# Altium PCB PCB_wordclocksmall_2022-11-27.pcbdoc (part 3 of 4)
Units mm, origin at the board's own origin, x right, y up, seen from the top; angles counter-clockwise.
Board outline 250.51 x 237.35 mm, 2 copper layers (Top Layer, Bottom Layer); 318 components, 218 nets, 1024 pads, 203 vias.
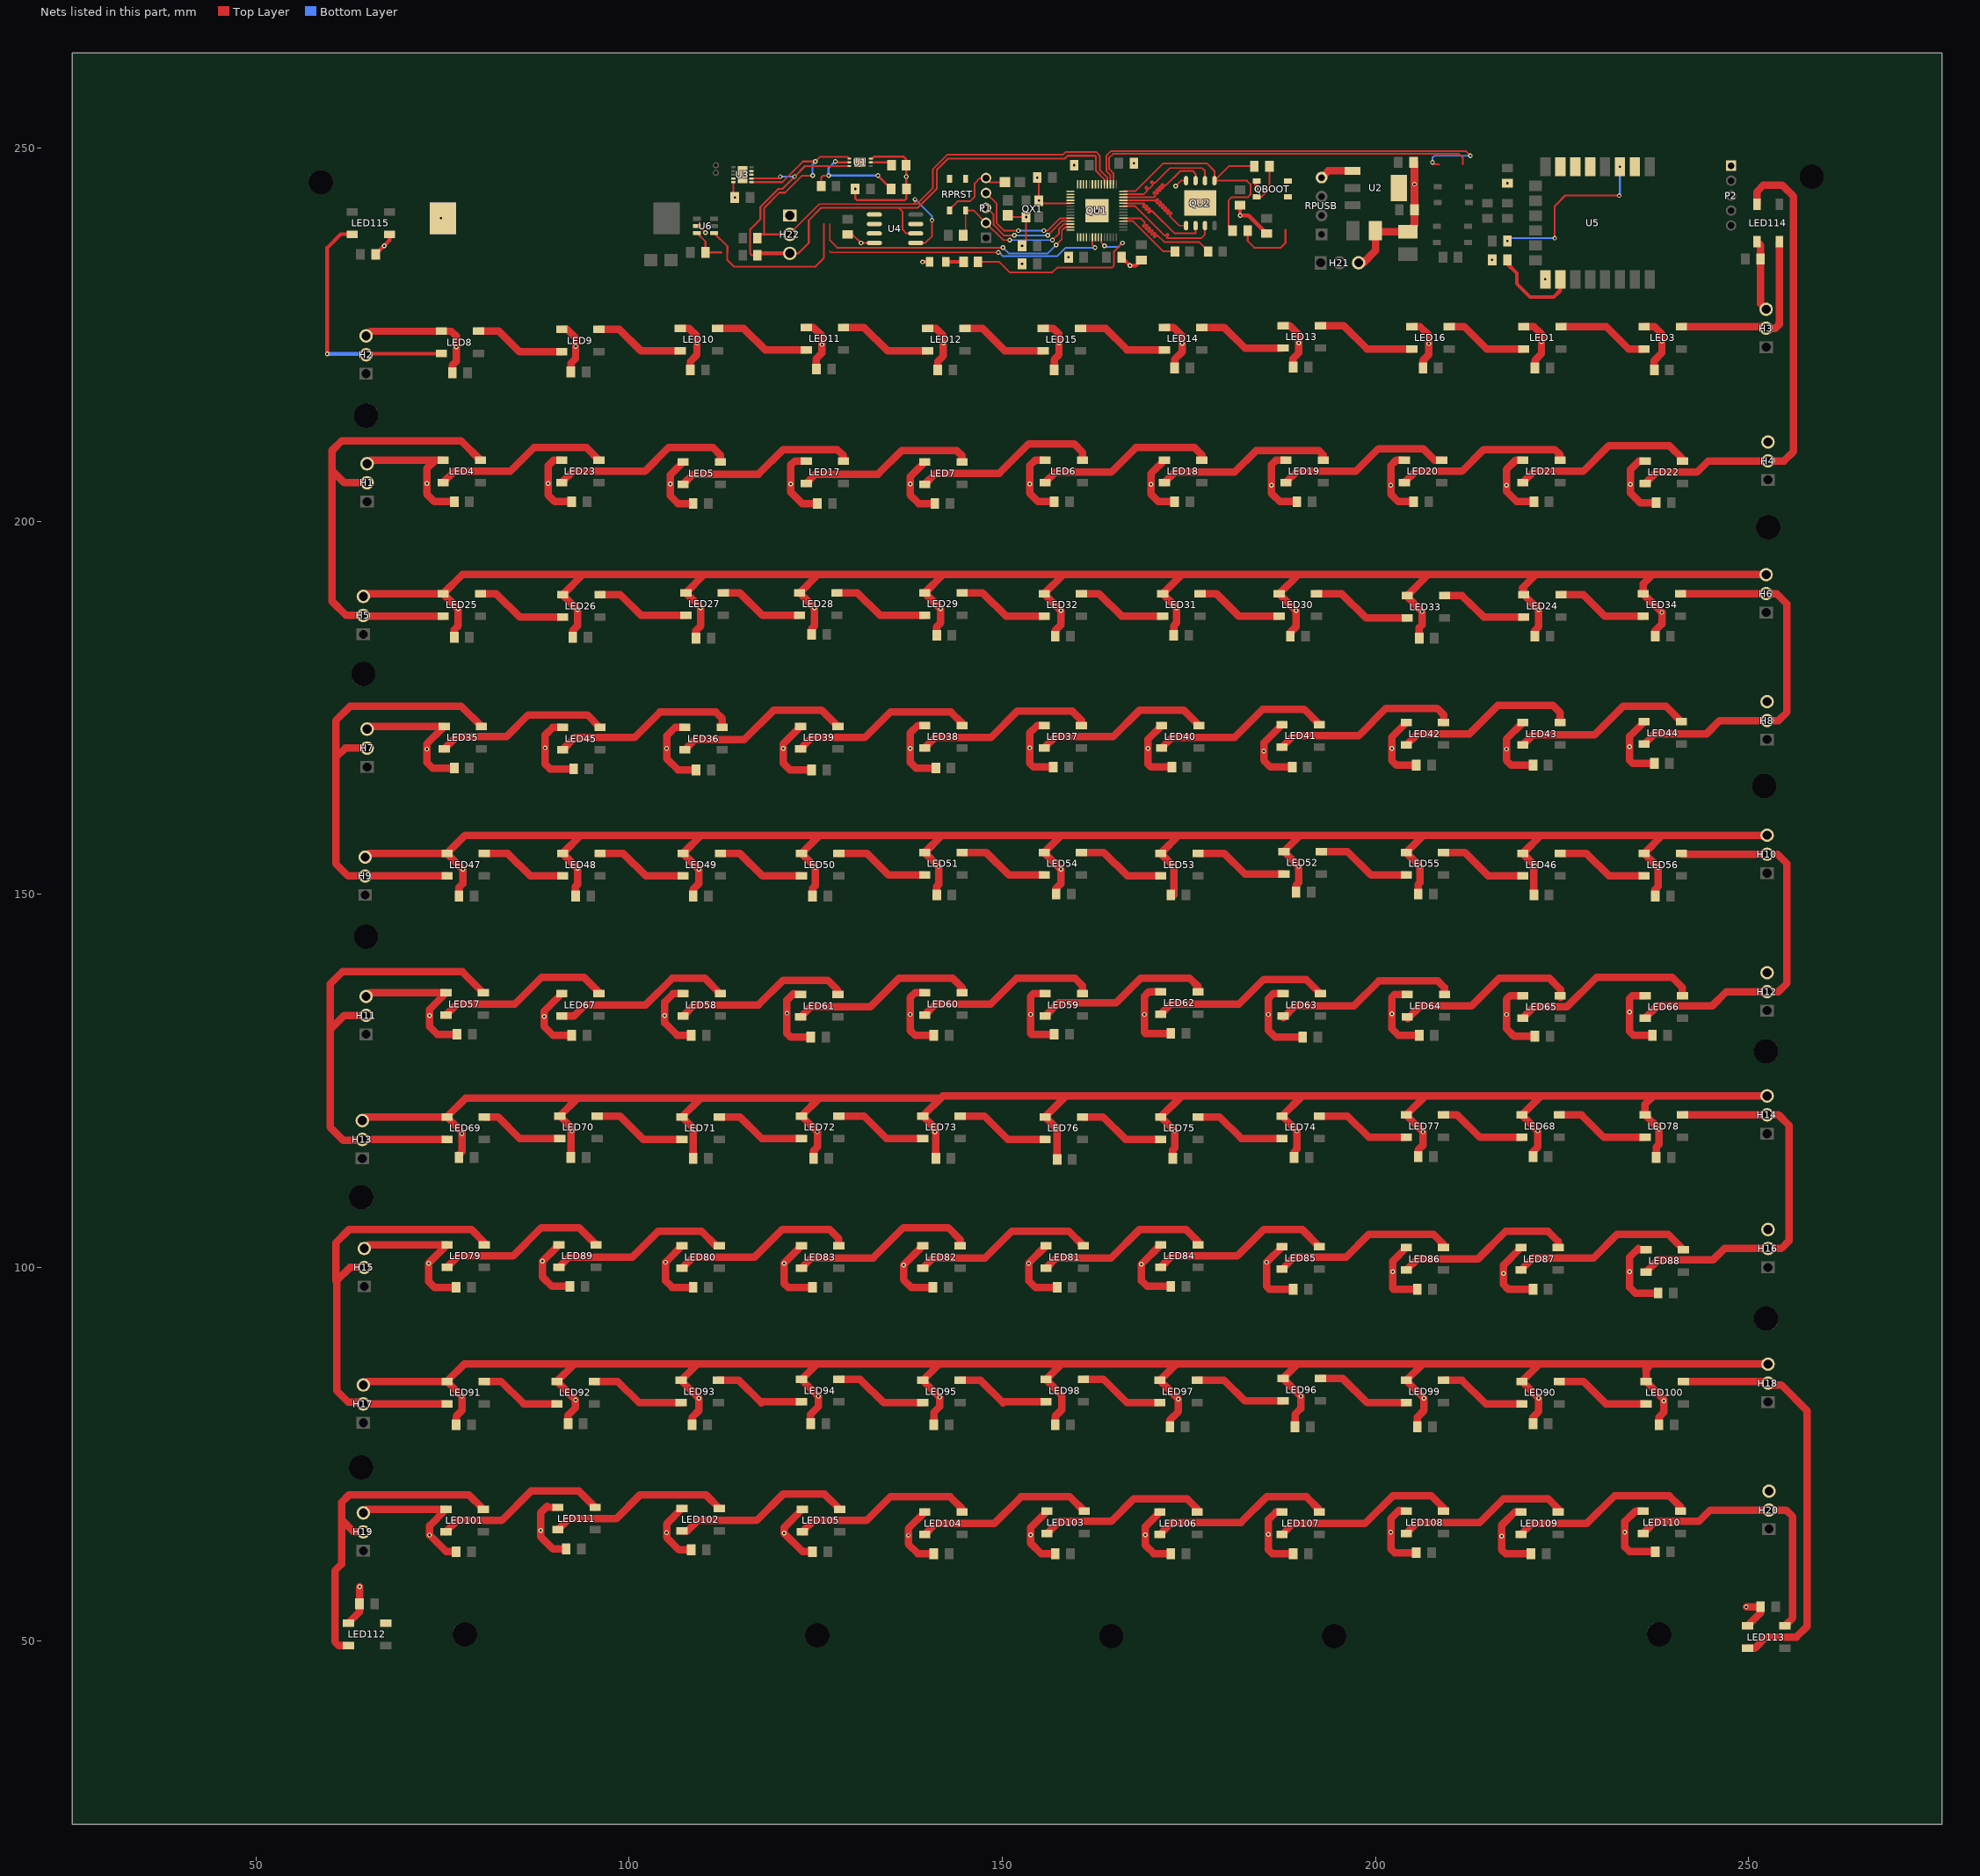
[diagram p3: the nets of this part, all layers, seen from the top]

## Via types
v1: diameter 0.635, hole 0.305, Top Layer to Bottom Layer, tented both sides, 165 vias
v2: diameter 0.61, hole 0.305, Top Layer to Bottom Layer, tented both sides, 37 vias
v3: diameter 1, hole 0.5, Top Layer to Bottom Layer, tented both sides, 1 vias

## Nets (pads, with @x,y where several pads share a name; then routed paths per layer and width w, separated by ;. In a path a pad name is that pad's centre, name@x,y a point inside that pad or via, vN(x,y) a via of type N, cw(c..) or ccw(c..) an arc to the next point about the centre after c; other vN are vias at no path point) (continued)
GND: BT1.2 BT2.2 C1.2 C2.1 C3.2 C5.2 C6.1 C7.2 C8.2 C9.2 C10.1 C11.2 C12.2 C13.2 C14.2 C15.2 C16.2 C17.2 C18.2 C19.2 C20.2 C21.2 C22.2 C23.2 C24.2 C25.2 C26.2 C27.2 C28.2 C29.2 C30.2 C31.2 C32.2 C33.2 C34.2 C35.2 C36.2 C37.2 C38.2 C39.2 C40.2 C41.2 C42.2 C43.2 C44.2 C45.2 C46.2 C47.2 C48.2 C49.2 C50.2 C51.2 C52.2 C53.2 C54.2 C55.2 C56.2 C57.2 C58.2 C59.2 C60.2 C61.2 C62.2 C63.2 C64.2 C65.2 C66.2 C67.2 C68.2 C69.2 C70.2 C71.2 C72.2 C73.2 C74.2 C75.2 C76.2 C77.2 C78.2 C79.2 C80.2 C81.2 C82.2 C83.2 C84.2 C85.2 C86.2 C87.2 C88.2 C89.2 C90.2 C91.2 C92.2 C93.2 C94.2 C95.2 C96.2 C97.2 C98.2 C99.2 C100.2 C101.2 C102.2 C103.2 C104.2 C105.2 C106.2 C107.2 C108.2 C109.2 C110.2 C111.2 C112.2 C113.2 C114.2 C115.2 C116.2 C117.2 C118.2 C119.2 C120.2 C121.2 C122.2 C123.2 C124.2 C125.1 C126.1 C127.1 C128.1 C129.2 C130.2 C131.1 C132.1 C133.1 C134.2 C135.1 C136.2 H1.3 H2.3 H3.3 H4.3 H5.3 H6.3 H7.3 H8.3 H9.3 H10.3 H11.3 H12.3 H13.3 H14.3 H15.3 H16.3 H17.3 H18.3 H19.3 H20.3 H21.3 H22.1 LED1.3 LED3.3 LED4.3 LED5.3 LED6.3 LED7.3 LED8.3 LED9.3 LED10.3 LED11.3 LED12.3 LED13.3 LED14.3 LED15.3 LED16.3 LED17.3 LED18.3 LED19.3 LED20.3 LED21.3 LED22.3 LED23.3 LED24.3 LED25.3 LED26.3 LED27.3 LED28.3 LED29.3 LED30.3 LED31.3 LED32.3 LED33.3 LED34.3 LED35.3 LED36.3 LED37.3 LED38.3 LED39.3 LED40.3 LED41.3 LED42.3 LED43.3 LED44.3 LED45.3 LED46.3 LED47.3 LED48.3 LED49.3 LED50.3 LED51.3 LED52.3 LED53.3 LED54.3 LED55.3 LED56.3 LED57.3 LED58.3 LED59.3 LED60.3 LED61.3 LED62.3 LED63.3 LED64.3 LED65.3 LED66.3 LED67.3 LED68.3 LED69.3 LED70.3 LED71.3 LED72.3 LED73.3 LED74.3 LED75.3 LED76.3 LED77.3 LED78.3 LED79.3 LED80.3 LED81.3 LED82.3 LED83.3 LED84.3 LED85.3 LED86.3 LED87.3 LED88.3 LED89.3 LED90.3 LED91.3 LED92.3 LED93.3 LED94.3 LED95.3 LED96.3 LED97.3 LED98.3 LED99.3 LED100.3 LED101.3 LED102.3 LED103.3 LED104.3 LED105.3 LED106.3 LED107.3 LED108.3 LED109.3 LED110.3 LED111.3 LED112.3 LED113.3 LED114.3 LED115.3 LED116.1 P1.5 P2.1 QBOOT.4 QU1.19 QU1.57 QU2.4 QX1.2 QX1.4 R1.2 R16.1 RPRST.4 RPUSB.4 U1.3 U2.1 U3.5 U4.4 U5.9 U6.2 | length 1994.6
  Top Layer w0.229: v1(131.066,237.291) U4.4@132.866,237.291 ; RPRST.4@142.945,241.668 142.945,241.804 144.02,242.879 145.671,242.879 146.306,243.514 146.306,245.292 146.941,245.927 147.767,245.927 P1.5@147.83,245.99 ; v1(152.656,236.91) 153.203,237.457 v1(153.203,240.763) ; v1(154.688,246.054) 154.903,245.839 v1(154.903,242.963) 155.257,242.609 QU1.19@159.139,242.609
  Top Layer w0.254: U6.2@109.089,239.577 109.349,239.577 v1(110.238,238.688) ; U3.5@113.974,245.435 113.974,243.588 v2(114.175,243.387) ; C136.2@129.288,238.434 129.923,238.434 v1(131.066,237.291) ; P1.5@147.83,245.99 148.401,245.419 C135.1@150.386,245.419 ; C134.2@150.751,240.99 150.978,240.763 v1(153.203,240.763) ; v1(173.23,244.911) 173.957,245.637 QU2.4@174.627,245.638
  Top Layer w0.3: v1(130.304,244.53) 130.304,243.26 130.558,243.006 136.908,243.006 137.162,243.26 C7.2@137.162,244.53 v1(137.162,246.181) 137.162,247.655 R1.2@137.113,247.705 ; U1.3@132.367,248.586 132.583,248.586 132.844,248.848 136.781,248.848 137.112,248.518 R1.2@137.113,247.705
  Top Layer w0.508: C122.2@66.042,235.767 v1(67.19,236.915) 67.907,237.632 LED115.3@67.907,238.458 ; v1(139.321,234.751) LED116.1@140.253,234.751 ; C133.1@165.991,235.386 v1(167.134,234.243) 167.896,234.243 C124.2@168.658,235.005 ; C129.2@181.866,242.371 v1(181.866,240.974) 183.009,240.974 C131.1@185.422,238.561 ; v2(184.025,244.53) 184.025,245.546 QBOOT.4@184.084,245.605
  Top Layer w0.991: H2.3@64.772,224.845 65.383,225.456 LED8.3@74.845,225.456 ; LED8.3@74.846,225.457 76.177,225.457 76.837,224.845 v1(76.837,223.378) 76.837,221.416 76.329,220.908 C16.2@76.329,219.892 ; LED9.3@90.975,225.711 91.719,225.711 92.839,224.591 v1(92.839,223.404) 92.839,221.797 92.204,221.162 C17.2@92.204,220.019 ; LED10.3@106.85,225.838 108.054,225.838 109.095,224.845 v1(109.095,223.861) 109.095,222.305 108.206,221.416 C18.2@108.206,220.273 ; LED11.3@123.741,225.965 124.691,225.965 125.859,224.845 v1(125.859,223.683) 125.859,222.559 125.097,221.797 C19.2@125.097,220.4 ; LED12.3@139.996,225.837 141.123,225.837 142.115,224.845 v1(142.115,223.912) 142.115,222.178 141.353,221.416 C20.2@141.353,220.273 ; LED15.3@155.491,225.838 156.822,225.838 157.609,225.099 v1(157.609,223.886) 157.609,222.305 156.974,221.67 C23.2@156.974,220.273 ; LED14.3@171.747,225.965 172.951,225.965 174.119,224.845 v1(174.119,223.836) 174.119,222.686 173.103,221.67 C22.2@173.103,220.527 ; LED13.3@187.621,226.218 188.494,226.218 189.74,224.972 v1(189.74,223.886) 189.74,222.559 188.978,221.797 C21.2@188.978,220.654 ; LED16.3@204.894,226.092 205.971,226.092 207.139,224.972 v1(207.139,223.81) 207.139,222.305 206.377,221.543 C5.2@206.377,220.527 ; LED1.3@219.88,226.092 221.211,226.092 222.252,225.099 v1(222.252,224.09) 222.252,222.432 221.363,221.543 C11.2@221.363,220.527 ; LED3.3@236.008,226.091 237.389,226.091 238.381,225.099 v1(238.381,224.14) 238.381,222.559 237.365,221.543 C1.2@237.365,220.273
  Top Layer w1: LED112.3@62.399,52.355 63.883,53.839 C119.2@63.883,54.919 v1(63.883,57.205) ; H13.3@64.264,119.689 64.748,120.173 LED69.3@75.607,120.173 ; H19.3@64.391,67.111 64.875,67.595 LED101.3@75.48,67.595 73.281,65.396 v1(73.281,64.137) 75.515,61.904 C108.2@76.837,61.904 ; H17.3@64.391,84.256 64.875,84.74 LED91.3@75.607,84.74 ; H5.3@64.391,189.92 64.748,190.277 LED25.3@75.099,190.277 ; H15.3@64.518,102.544 65.002,103.028 LED79.3@75.607,103.028 v1(73.154,100.575) 73.154,98.099 73.916,97.337 C86.2@76.837,97.337 ; H9.3@64.645,154.995 65.129,155.479 LED47.3@75.607,155.479 ; H11.3@64.772,136.326 65.256,136.81 LED57.3@75.48,136.81 73.281,134.611 v1(73.281,133.737) 73.281,132.262 74.297,131.246 C64.2@76.964,131.246 ; H7.3@64.899,172.14 65.256,172.497 LED35.3@75.226,172.497 72.9,170.171 v1(72.9,169.467) 72.9,167.695 73.662,166.933 C42.2@76.583,166.933 ; H1.3@64.899,207.7 65.383,208.184 LED4.3@75.099,208.184 ; v1(72.9,205.052) 72.9,203.636 73.916,202.62 C12.2@76.583,202.62 ; v1(72.9,205.052) 72.9,207.065 74.069,208.185 LED4.3@75.1,208.185 ; C32.2@76.583,184.459 76.583,185.475 77.091,185.983 v1(77.091,188.285) LED25.3@75.099,190.277 ; C98.2@76.837,78.922 76.837,80.065 77.599,80.827 v1(77.599,82.748) LED91.3@75.607,84.74 ; C76.2@77.218,114.736 77.218,115.117 77.599,115.498 v1(77.599,117.927) 77.599,118.181 LED69.3@75.607,120.173 ; C54.2@77.218,149.788 77.218,150.931 77.726,151.439 v1(77.726,153.36) LED47.3@75.607,155.479 ; v1(89.156,205.052) 89.156,203.509 90.045,202.62 C30.2@92.331,202.62 ; v1(89.156,205.052) 89.156,207.446 89.894,208.184 LED23.3@90.974,208.184 ; LED111.3@90.466,67.849 89.18,67.849 89.029,68 88.14,67.111 v1(88.14,64.747) 88.14,63.936 89.791,62.285 C118.2@91.569,62.285 ; LED89.3@90.593,103.028 v1(88.394,100.829) 88.394,98.734 89.664,97.464 C96.2@92.077,97.464 ; LED67.3@90.974,136.683 88.648,134.357 v1(88.648,133.653) 88.648,132.262 89.791,131.119 C74.2@92.331,131.119 ; LED45.3@91.101,172.37 89.767,172.37 88.775,171.378 v1(88.775,169.636) 88.775,167.441 89.41,166.806 C52.2@92.585,166.806 ; C99.2@91.823,79.049 91.823,80.192 92.839,81.208 v1(92.839,82.24) LED92.3@90.339,84.74 92.649,87.05 ; C77.2@92.204,114.736 92.204,118.181 v1(92.331,118.308) 92.331,118.689 LED70.3@90.72,120.3 93.109,122.688 109.619,122.688 ; C33.2@92.458,184.459 92.458,185.348 93.093,185.983 v1(93.093,188.158) LED26.3@91.101,190.15 93.792,192.841 ; C55.2@92.839,149.788 92.839,151.058 93.093,151.312 v1(93.093,153.487) LED48.3@91.101,155.479 93.538,157.916 ; 93.49,122.688 78.123,122.688 LED69.3@75.607,120.173 ; v1(105.539,205.001) 105.539,203.382 106.555,202.366 C13.2@108.587,202.366 ; v1(105.539,205.001) 105.539,206.239 LED5.3@107.23,207.93 ; LED102.3@107.103,67.722 105.031,65.65 v1(105.031,64.442) 105.031,63.809 106.682,62.158 C109.2@108.333,62.158 ; LED80.3@107.103,102.901 v1(104.904,100.702) 104.904,98.226 105.793,97.337 C87.2@108.587,97.337 ; LED58.3@107.23,136.683 105.896,136.683 104.777,135.564 v1(104.777,133.737) 104.777,132.77 106.428,131.119 C65.2@108.333,131.119 ; LED36.3@107.484,172.37 106.15,172.37 105.031,171.251 v1(105.031,169.551) 105.031,168.203 106.555,166.679 C43.2@108.968,166.679 ; C100.2@108.46,78.922 108.46,79.938 109.349,80.827 v1(109.349,82.494) LED93.3@106.976,84.867 109.159,87.05 ; C78.2@108.587,114.609 108.587,118.181 v1(108.841,118.435) LED71.3@107.103,120.173 109.619,122.688 ; C56.2@108.587,149.788 108.587,150.677 109.349,151.439 v1(109.349,153.36) LED49.3@107.23,155.479 109.667,157.916 ; C34.2@108.968,184.332 108.968,185.348 109.603,185.983 v1(109.603,188.412) LED27.3@107.611,190.404 110.048,192.841 ; v1(120.779,64.391) 123.266,61.904 C110.2@124.589,61.904 ; v1(120.779,64.391) 120.779,65.142 LED105.3@123.232,67.595 ; v1(121.668,205.001) 121.668,203.89 123.192,202.366 C14.2@125.224,202.366 ; v1(121.668,205.001) 121.668,207.573 122.202,208.058 LED17.3@123.741,208.058 ; LED61.3@122.978,136.556 122.2,136.556 122.049,136.707 121.16,135.818 v1(121.16,134.076) 121.16,131.373 121.668,130.865 C66.2@124.335,130.865 ; LED39.3@122.978,172.497 120.652,170.171 v1(120.652,169.551) 120.652,167.568 121.541,166.679 C44.2@124.462,166.679 ; LED83.3@123.105,102.901 v1(120.779,100.575) 120.779,97.845 121.287,97.337 C88.2@124.589,97.337 ; C101.2@124.335,79.049 124.335,80.319 125.351,81.335 v1(125.351,82.748) LED94.3@123.105,84.994 125.161,87.05 ; C35.2@124.462,184.84 124.462,185.602 124.843,185.983 v1(124.843,188.412) LED28.3@122.851,190.404 125.288,192.841 ; C57.2@124.589,149.788 124.589,150.804 124.97,151.185 v1(124.97,153.614) LED50.3@123.105,155.479 125.542,157.916 ; C79.2@124.716,114.609 124.716,115.625 125.224,116.133 v1(125.224,118.181) LED72.3@123.105,120.3 125.494,122.688 ; v1(137.67,205.001) 137.67,203.509 138.813,202.366 C15.2@140.972,202.366 ; v1(137.67,205.001) 137.67,205.985 LED7.3@139.615,207.93 ; LED82.3@139.361,102.901 v1(136.781,100.321) 136.781,98.353 137.797,97.337 C89.2@140.718,97.337 ; LED104.3@139.615,67.214 137.416,65.015 v1(137.416,64.086) 137.416,62.92 138.686,61.65 C111.2@140.845,61.65 ; LED60.3@139.616,136.811 138.331,136.811 137.67,136.199 v1(137.67,133.907) 137.67,131.754 138.305,131.119 C67.2@140.845,131.119 ; LED38.3@139.616,172.625 138.712,172.625 137.67,171.632 v1(137.67,169.551) 137.67,167.695 138.432,166.933 C45.2@141.099,166.933 ; C102.2@140.845,78.922 140.845,80.573 141.607,81.335 v1(141.607,82.621) LED95.3@139.361,84.867 141.544,87.05 ; C80.2@141.099,114.609 141.099,118.032 v1(140.972,118.159) 140.972,118.689 LED73.3@139.361,120.3 142.052,122.991 158.562,122.991 ; C58.2@141.226,149.915 141.226,151.058 141.48,151.312 v1(141.48,153.741) LED51.3@139.615,155.606 141.925,157.916 ; C36.2@141.226,184.713 141.226,185.856 141.734,186.364 v1(141.734,188.285) LED29.3@139.615,190.404 142.052,192.841 ; 141.75,122.688 125.494,122.688 ; LED37.3@155.618,172.625 154.714,172.625 153.672,171.632 v1(153.672,169.636) 153.672,167.568 154.18,167.06 C46.2@156.847,167.06 ; LED59.3@155.744,136.683 154.156,136.683 153.799,136.326 v1(153.799,133.907) 153.799,131.373 153.926,131.246 C68.2@156.974,131.246 ; LED6.3@155.744,208.184 154.41,208.184 153.672,207.446 v1(153.672,205.001) 153.672,203.763 154.815,202.62 C24.2@156.974,202.62 ; LED81.3@155.871,102.901 v1(153.545,100.575) 153.545,98.226 154.434,97.337 C90.2@157.355,97.337 ; LED103.3@155.998,67.341 153.799,65.142 v1(153.799,64.188) 153.799,63.047 155.196,61.65 C112.2@157.101,61.65 ; C103.2@157.101,78.922 157.101,80.065 157.99,80.954 157.99,82.875 LED98.3@155.871,84.994 157.927,87.05 ; C37.2@157.101,184.586 157.101,185.348 157.863,186.11 v1(157.863,188.031) LED32.3@155.617,190.277 158.181,192.841 ; C59.2@157.228,150.042 157.228,150.804 157.863,151.439 v1(157.863,153.36) LED54.3@155.617,155.606 157.927,157.916 ; C81.2@157.355,114.482 157.355,118.562 v1(157.228,118.689) LED76.3@155.744,120.173 158.562,122.991 ; LED106.3@171.111,67.214 169.166,65.269 v1(169.166,64.188) 169.166,62.793 170.309,61.65 C113.2@172.595,61.65 ; LED84.3@171.238,103.028 v1(168.658,100.448) 168.658,98.226 169.42,97.464 C91.2@172.595,97.464 ; LED62.3@171.238,136.937 169.65,136.937 169.039,136.326 v1(169.039,133.907) 169.039,131.5 169.166,131.373 C69.2@172.595,131.373 ; LED40.3@171.365,172.624 169.547,170.806 v1(169.547,169.551) 169.547,167.441 169.928,167.06 C47.2@172.722,167.06 ; LED18.3@171.746,208.184 169.928,206.366 v1(169.928,204.916) 169.928,203.636 170.944,202.62 C25.2@173.103,202.62 ; C104.2@172.468,78.668 172.468,79.557 173.611,80.7 v1(173.611,82.367) LED97.3@171.111,84.867 173.294,87.05 ; C60.2@172.595,149.915 172.976,149.915 v1(172.976,153.741) ; C82.2@172.849,114.609 172.849,115.752 173.103,116.006 v1(173.103,118.308) LED75.3@171.238,120.173 174.056,122.991 ; v1(172.976,153.741) LED53.3@171.238,155.479 173.675,157.916 ; C38.2@172.976,184.713 172.976,185.983 173.357,186.364 v1(173.357,188.412) LED31.3@171.492,190.277 174.056,192.841 ; LED107.3@187.494,67.214 186.668,67.214 185.676,66.222 v1(185.676,64.239) 185.676,62.158 186.184,61.65 C114.2@188.978,61.65 ; LED85.3@187.494,102.774 v1(185.422,100.702) 185.422,97.464 185.803,97.083 C92.2@188.978,97.083 ; LED41.3@187.494,172.751 185.041,170.298 v1(185.041,169.213) 185.041,167.949 185.93,167.06 C48.2@188.851,167.06 ; LED63.3@187.621,136.683 186.287,136.683 185.676,136.072 v1(185.676,133.907) 185.676,131.754 186.565,130.865 C70.2@190.248,130.865 ; LED19.3@188.002,208.184 186.668,208.184 186.057,207.573 v1(186.057,204.832) 186.057,203.763 187.2,202.62 C26.2@189.486,202.62 ; C39.2@188.597,184.586 188.597,185.094 189.359,185.856 v1(189.359,188.031) LED30.3@187.113,190.277 189.677,192.841 ; C83.2@189.105,114.736 189.105,115.498 189.486,115.879 v1(189.486,118.308) LED74.3@187.494,120.3 190.185,122.991 ; C105.2@189.232,78.668 189.232,80.319 189.994,81.081 v1(189.994,82.748) LED96.3@187.621,85.121 189.55,87.05 206.736,87.05 ; C61.2@189.359,150.296 189.359,151.185 189.74,151.566 v1(189.74,153.741) LED52.3@187.748,155.733 189.931,157.916 ; 190.074,87.05 173.294,87.05 ; v1(202.059,64.544) 202.059,62.285 202.567,61.777 C115.2@205.488,61.777 ; v1(202.059,64.544) 202.059,66.349 203.202,67.492 203.353,67.341 LED108.3@204.131,67.341 ; LED20.3@203.877,208.184 202.797,208.184 202.059,207.446 v1(202.059,204.832) 202.059,203.636 203.075,202.62 C27.2@205.107,202.62 ; LED86.3@204.131,102.647 202.313,100.829 v1(202.313,99.447) 202.313,97.21 202.44,97.083 C93.2@205.615,97.083 ; LED42.3@204.131,173.005 202.186,171.06 v1(202.186,169.551) 202.186,167.949 202.821,167.314 C49.2@205.488,167.314 ; LED64.3@204.258,136.556 202.543,136.556 202.186,136.199 v1(202.186,133.991) 202.186,132.008 203.075,131.119 C71.2@205.869,131.119 ; C106.2@205.615,78.668 205.615,79.938 206.504,80.827 v1(206.504,82.494) LED99.3@204.131,84.867 206.314,87.05 221.935,87.05 ; C84.2@205.742,114.863 205.742,115.752 206.377,116.387 v1(206.377,118.181) LED77.3@204.131,120.427 206.695,122.991 222.189,122.991 ; C62.2@205.742,150.042 205.742,151.312 205.996,151.566 v1(205.996,153.741) LED55.3@204.131,155.606 206.441,157.916 ; C40.2@205.869,184.332 205.869,185.729 206.25,186.11 v1(206.25,187.888) 204.258,189.88 LED33.3@204.258,190.023 207.076,192.841 ; 207.153,122.991 190.185,122.991 ; LED109.3@219.498,67.214 218.672,67.214 216.918,65.46 v1(216.918,63.985) 216.918,62.158 217.426,61.65 C116.2@220.855,61.65 ; LED87.3@219.498,102.647 217.172,100.321 v1(217.172,99.193) 217.172,97.718 217.807,97.083 C94.2@221.109,97.083 ; LED65.3@219.752,136.429 218.037,136.429 217.553,135.945 v1(217.553,133.907) 217.553,132.008 218.569,130.992 C72.2@221.363,130.992 ; LED43.3@219.752,173.005 217.553,170.806 v1(217.553,169.467) 217.553,167.949 218.188,167.314 C50.2@221.109,167.314 ; LED21.3@219.752,208.184 218.799,208.184 217.553,206.938 v1(217.553,204.832) 217.553,204.017 218.95,202.62 C28.2@221.236,202.62 ; C97.2@221.109,79.049 221.109,79.938 221.871,80.7 v1(221.871,82.494) LED90.3@219.625,84.74 221.935,87.05 ; C75.2@221.109,114.863 221.109,115.498 221.744,116.133 v1(221.744,118.308) LED68.3@219.625,120.427 222.189,122.991 ; C53.2@221.236,149.915 221.236,153.741 v1(221.363,153.868) LED46.3@219.752,155.479 222.189,157.916 ; C31.2@221.363,184.586 221.363,185.348 221.871,185.856 v1(221.871,188.158) LED24.3@219.879,190.15 219.879,190.896 219.712,191.063 221.49,192.841 ; LED110.3@235.882,67.342 234.851,67.342 233.428,65.968 v1(233.428,64.544) 233.428,62.539 234.063,61.904 C117.2@237.492,61.904 ; LED44.3@236.008,173.132 234.063,171.187 v1(234.063,169.805) 234.063,167.949 234.444,167.568 C51.2@237.365,167.568 ; LED66.3@236.135,136.429 234.42,136.429 234.063,136.072 v1(234.063,134.245) 234.063,131.627 234.571,131.119 C73.2@237.111,131.119 ; LED22.3@236.135,208.057 235.309,208.057 234.19,206.938 v1(234.19,204.916) 234.19,203.763 235.46,202.493 C29.2@237.619,202.493 ; LED88.3@236.262,102.393 235.357,102.393 235.206,102.544 234.063,101.401 v1(234.063,99.447) 234.063,97.337 234.825,96.575 C95.2@237.873,96.575 ; C63.2@237.492,149.788 237.492,150.677 237.873,151.058 v1(237.873,153.614) LED56.3@236.008,155.479 238.445,157.916 ; C41.2@237.492,184.586 237.492,185.348 238.381,186.237 v1(238.381,187.777) LED34.3@235.881,190.277 235.881,191.611 237.111,192.841 ; C85.2@237.619,114.736 237.619,116.133 238,116.514 v1(238,118.562) LED78.3@236.135,120.427 236.135,121.888 237.238,122.991 ; C107.2@238,78.922 238,79.938 238.635,80.573 v1(238.635,82.113) 238.635,82.367 LED100.3@236.262,84.74 236.262,86.248 236.222,86.288 236.984,87.05 ; v1(249.684,54.538) C120.2@251.589,54.538 251.589,53.712 LED113.3@249.851,51.974 ; H6.3@252.351,192.841 237.111,192.841 ; H14.3@252.478,122.991 237.238,122.991 ; H10.3@252.478,157.916 238.445,157.916 ; H18.3@252.605,87.05 236.984,87.05 ; LED25.3@75.099,190.277 77.663,192.841 93.792,192.841 ; LED91.3@75.607,84.74 77.917,87.05 92.649,87.05 ; LED47.3@75.607,155.479 78.044,157.916 93.538,157.916 ; 92.649,87.05 109.159,87.05 ; 93.538,157.916 109.667,157.916 ; 93.792,192.841 110.048,192.841 ; 109.159,87.05 125.161,87.05 ; 109.619,122.688 125.494,122.688 ; 109.667,157.916 125.542,157.916 ; 110.048,192.841 125.288,192.841 ; 125.161,87.05 141.544,87.05 ; 125.288,192.841 142.052,192.841 ; 125.542,157.916 141.925,157.916 ; 141.544,87.05 157.927,87.05 ; 141.925,157.916 157.927,157.916 ; 142.052,192.841 158.181,192.841 ; 157.927,87.05 173.294,87.05 ; 157.927,157.916 173.675,157.916 ; 158.181,192.841 174.056,192.841 ; 158.562,122.991 174.056,122.991 ; 173.675,157.916 189.931,157.916 ; 174.056,122.991 190.185,122.991 ; 174.056,192.841 189.677,192.841 ; 189.677,192.841 207.076,192.841 ; 189.931,157.916 206.441,157.916 ; 206.441,157.916 222.189,157.916 ; 207.076,192.841 221.49,192.841 ; 221.49,192.841 237.111,192.841 ; 221.935,87.05 236.984,87.05 ; 222.189,122.991 237.238,122.991 ; 222.189,157.916 238.445,157.916
  Top Layer w1.016: RPUSB.4@192.788,246.054 193.69,246.956 U2.1@196.929,246.956 ; H21.3@197.741,234.624 198.376,234.624 200.004,236.252 C8.2@200.004,238.942 200.154,238.792 C9.2@204.345,238.792 205.234,239.681 C2.1@205.234,241.736 v2(205.234,245.165) 205.234,248.086 C10.1@205.107,248.086 ; LED114.3@251.105,237.458 251.589,236.974 C121.2@251.589,235.132 251.589,229.163 H3.3@252.351,228.401
  other v1: 152.656,234.497 158.879,235.386 74.805,240.593 162.689,241.609 159.641,247.705 167.642,247.959
  other v2: 222.761,232.409 215.648,235.005 217.68,245.292
GPIO0: JP11.2 QU1.2 | length 52.5
  Top Layer w0.229: QU1.2@164.889,245.16 164.889,246.648 164.34,247.197 164.34,248.721 164.848,249.229 211.203,249.229 211.686,248.746 JP11.2@211.686,247.832
GPIO1: JP10.2 QU1.3 | length 60.1
  Top Layer w0.229: QU1.3@164.489,245.159 164.489,246.413 163.959,246.943 163.959,248.975 164.594,249.61 212.092,249.61 v2(212.727,248.975) ; v2(207.647,248.086) 207.901,247.832 JP10.2@208.511,247.832
  Bottom Layer w0.229: v2(207.647,248.086) 207.647,248.721 207.901,248.975 v2(212.727,248.975)
GPIO2: H22.2 QU1.4 R3.2 U1.4 U3.6 U4.5 | length 97.8
  Top Layer w0.229: H22.2@121.541,238.434 121.541,238.561 125.478,242.498 138.559,242.498 140.718,244.657 140.718,247.197 142.623,249.102 158.117,249.102 158.498,249.483 162.562,249.483 163.07,248.975 163.07,247.07 164.089,246.051 QU1.4@164.089,245.16 ; 138.063,242.498 138.305,242.74 v2(138.305,243.133) ; U4.5@138.411,237.291 139.702,237.291 140.591,238.18 v2(140.591,240.339)
  Top Layer w0.254: U3.6@116.409,245.435 120.541,245.434 123.319,248.213 v1(124.97,248.213) 125.605,248.848 129.25,248.848 U1.4@129.512,248.586 ; R3.2@117.174,237.926 117.682,238.434 H22.2@121.541,238.434 118.112,238.434 118.112,241.99 120.144,244.022 120.906,244.022 123.192,246.308 v1(124.589,246.308)
  Bottom Layer w0.229: v2(138.305,243.133) 140.591,240.847 v2(140.591,240.339)
  Bottom Layer w0.254: v1(124.589,246.308) 124.589,247.832 v1(124.97,248.213)
GPIO3: H22.3 QU1.5 R4.2 U1.6 U3.7 U4.6 | length 91.4
  Top Layer w0.229: 136.12,241.99 136.654,241.455 136.654,239.069 137.162,238.561 U4.6@138.411,238.561
  Top Layer w0.254: U3.7@116.409,245.935 120.025,245.935 v2(120.271,246.181) ; R4.2@117.174,235.64 116.461,235.64 116.207,235.894 116.207,239.069 117.604,240.466 117.604,242.117 120.017,244.53 120.525,244.53 v2(122.176,246.181) 123.581,247.586 U1.6@129.512,247.586 ; H22.3@121.541,235.894 122.684,235.894 124.081,237.291 124.081,240.339 125.732,241.99 138.686,241.99 141.226,244.53 141.226,247.07 142.75,248.594 158.371,248.594 158.752,248.975 162.435,248.975 162.562,248.848 162.562,246.943 163.69,245.815 QU1.5@163.69,245.16
  Top Layer w0.5: R4.2@117.174,235.64 117.428,235.894 H22.3@121.541,235.894
  Bottom Layer w0.254: v2(120.271,246.181) v2(122.176,246.181)
GPIO4: QU1.6
GPIO5: QU1.7
GPIO6: QU1.8
GPIO7: QU1.9
GPIO8: QU1.11
GPIO9: QU1.12
GPIO10: QU1.13
GPIO11: QU1.14
GPIO12: QU1.15
GPIO13: QU1.16
GPIO14: QU1.17
GPIO15: QU1.18
GPIO16: JP7.1 QU1.27 | length 37.3
  Top Layer w0.229: JP7.1@126.901,239.831 126.901,237.647 127.891,236.656 v1(150.116,236.656) ; v1(157.228,237.037) 157.99,237.799 157.99,238.942 158.457,239.409 QU1.27@159.139,239.409
  Bottom Layer w0.229: v1(150.116,236.656) 150.878,235.894 156.085,235.894 v1(157.228,237.037)
GPIO17: QU1.28
GPIO18: QU1.29
GPIO19: QU1.30
GPIO20: QU1.31
GPIO21: QU1.32
GPIO22: JP6.1 QU1.34 | length 37.8
  Top Layer w0.229: JP6.1@126.901,236.148 127.028,236.021 v1(149.481,236.021) ; QU1.34@162.089,238.059 162.089,237.002 v1(162.435,236.656)
  Bottom Layer w0.229: v1(149.481,236.021) 149.608,236.021 150.116,235.513 157.355,235.513 158.498,236.656 v1(162.435,236.656)
GPIO23: QU1.35
GPIO24: QU1.36
GPIO25: QU1.37 R13.1 | length 26.7
  Top Layer w0.229: R13.1@146.765,234.751 149.608,234.751 151.005,233.354 156.72,233.354 157.355,233.989 164.721,233.989 164.975,234.243 164.975,236.148 v1(166.118,237.291) ; QU1.37@163.289,238.059 163.289,237.326 v1(163.705,236.91)
  Bottom Layer w0.229: v1(163.705,236.91) 163.832,236.783 165.61,236.783 v1(166.118,237.291)
H1_2: H1.2 H5.2 LED4.2 LED25.4 | length 62.8
  Top Layer w1: H1.2@64.899,205.16 61.851,205.16 60.2,206.811 ; LED25.4@75.099,187.277 64.494,187.277 H5.2@64.391,187.38 62.105,187.38 60.2,189.285 60.2,206.811 ; LED4.2@80.099,208.184 77.535,210.748 61.47,210.748 60.2,209.478 60.2,206.811
H7_2: H7.2 H9.2 LED35.2 LED47.4 | length 60.9
  Top Layer w1: H7.2@64.899,169.6 61.978,169.6 60.708,168.33 ; LED47.4@75.607,152.479 H9.2@64.645,152.455 62.359,152.455 60.708,154.106 60.708,168.33 ; LED35.2@80.226,172.497 77.535,175.188 62.613,175.188 60.708,173.283 60.708,168.33
H11_2: H11.2 H13.2 LED57.2 LED69.4 | length 63.6
  Top Layer w1: H11.2@64.772,133.786 61.851,133.786 59.946,131.881 ; LED69.4@75.607,117.173 64.288,117.173 H13.2@64.264,117.149 64.137,117.022 61.724,117.022 59.946,118.8 59.946,131.881 ; LED57.2@80.48,136.81 77.662,139.628 61.597,139.628 59.946,137.977 59.946,131.881
H15_2: H15.2 H17.2 LED79.2 LED91.4 | length 61.4
  Top Layer w1: 60.708,98.226 60.708,103.306 62.486,105.084 78.869,105.084 80.607,103.346 LED79.2@80.607,103.028 ; H15.2@64.518,100.004 62.613,100.004 60.835,98.226 60.835,83.494 62.359,81.97 64.137,81.97 H17.2@64.391,81.716 LED91.4@75.607,81.74
H19_2: H19.2 LED101.2 LED112.4 | length 44.9
  Top Layer w1: LED112.4@62.4,49.356 61.066,49.356 60.581,49.839 60.581,59.364 61.47,60.253 61.47,66.222 ; H19.2@64.391,64.571 63.121,64.571 61.47,66.222 ; LED101.2@80.48,67.595 78.551,69.524 62.486,69.524 61.47,68.508 61.47,66.222
JP3_1: JP3.1 R12.1 | length 8.9
  Top Layer w0.254: R12.1@182.882,238.942 182.882,237.545 183.771,236.656 187.327,236.656 187.962,237.291 JP3.1@187.962,239.044
JP6_2: JP6.2 JP7.2 JP8.2 U6.4 | length 22.7
  Top Layer w0.254: U6.4@111.387,238.627 113.185,236.83 JP8.2@113.185,236.021 113.159,235.996 113.159,235.005 114.048,234.116 124.97,234.116 126.088,235.234 JP6.2@126.088,236.148 JP7.2@126.088,239.831
LED1_2: LED1.2 LED3.4 | length 12.4
  Top Layer w1: LED1.2@224.879,226.091 230.914,226.09 233.913,223.09 LED3.4@236.008,223.091
LED1_4: LED1.4 LED16.2 | length 11.2
  Top Layer w1: LED16.2@209.893,226.091 211.864,226.09 214.909,223.09 LED1.4@219.879,223.091
LED3_2: H3.2 LED3.2 LED114.4 | length 24.5
  Top Layer w1: LED3.2@241.008,226.091 252.121,226.091 H3.2@252.351,225.861 253.597,225.861 254.105,226.369 LED114.4@254.105,237.458
LED4_4: LED4.4 LED23.2 | length 23.5
  Top Layer w1: LED4.4@75.099,205.184 76.599,206.684 84.076,206.684 87.251,209.859 94.299,209.859 LED23.2@95.974,208.184
LED5_2: LED5.2 LED23.4 | length 24.5
  Top Layer w1: LED23.4@90.974,205.184 92.474,206.684 102.11,206.684 105.285,209.859 111.254,209.859 112.23,208.883 LED5.2@112.23,207.93
LED5_4: LED5.4 LED17.2 | length 24.5
  Top Layer w1: LED5.4@107.23,204.93 108.603,206.303 117.35,206.303 120.652,209.605 127.891,209.605 128.74,208.756 LED17.2@128.74,208.057
LED6_2: LED6.2 LED7.4 | length 24.9
  Top Layer w1: LED7.4@139.615,204.93 141.115,206.43 149.608,206.43 153.545,210.367 159.641,210.367 160.744,209.264 LED6.2@160.744,208.184
LED6_4: LED6.4 LED18.2 | length 24
  Top Layer w1: LED6.4@155.744,205.184 157.117,206.557 164.594,206.557 167.896,209.859 175.77,209.859 176.746,208.883 LED18.2@176.746,208.184
LED7_2: LED7.2 LED17.4 | length 23.8
  Top Layer w1: LED17.4@123.74,205.057 124.986,206.303 133.352,206.303 136.527,209.478 143.893,209.478 144.615,208.756 LED7.2@144.615,207.93
LED8_2: LED8.2 LED9.4 | length 12.3
  Top Layer w1: LED8.2@79.845,225.456 82.577,225.456 85.322,222.71 LED9.4@90.974,222.71
LED9_2: LED9.2 LED10.4 | length 12.1
  Top Layer w1: LED9.2@95.974,225.71 98.706,225.71 101.578,222.837 LED10.4@106.849,222.837
LED10_2: LED10.2 LED11.4 | length 13.1
  Top Layer w1: LED10.2@111.849,225.837 115.344,225.836 118.262,222.963 LED11.4@123.74,222.964
LED11_2: LED11.2 LED12.4 | length 12.5
  Top Layer w1: LED11.2@128.74,225.964 131.473,225.963 134.645,222.836 LED12.4@139.996,222.837
LED12_2: LED12.2 LED15.4 | length 11.7
  Top Layer w1: LED12.2@144.996,225.837 147.347,225.837 150.346,222.837 LED15.4@155.49,222.837
LED13_2: LED13.2 LED16.4 | length 13.6
  Top Layer w1: LED13.2@192.621,226.218 195.733,226.218 198.86,223.091 LED16.4@204.893,223.091
LED13_4: LED13.4 LED14.2 | length 12
  Top Layer w1: LED14.2@176.746,225.965 179.733,225.965 182.527,223.217 LED13.4@187.621,223.218
LED14_4: LED14.4 LED15.2 | length 12.4
  Top Layer w1: LED15.2@160.49,225.837 163.856,225.837 166.729,222.964 LED14.4@171.746,222.964
LED18_4: LED18.4 LED19.2 | length 24
  Top Layer w1: LED18.4@171.746,205.184 173.119,206.557 181.104,206.557 184.025,209.478 192.407,209.478 193.002,208.884 LED19.2@193.002,208.185
LED19_4: LED19.4 LED20.2 | length 23.4
  Top Layer w1: LED19.4@188.002,205.184 189.502,206.684 197.36,206.684 200.408,209.732 206.377,209.732 207.925,208.184 LED20.2@208.877,208.184
LED20_4: LED20.4 LED21.2 | length 23.7
  Top Layer w1: LED20.4@203.877,205.184 205.377,206.684 211.584,206.684 214.505,209.605 224.03,209.605 224.752,208.884 LED21.2@224.752,208.185
LED21_4: LED21.4 LED22.2 | length 24.5
  Top Layer w1: LED21.4@219.752,205.184 221.252,206.684 227.84,206.684 231.269,210.113 239.397,210.113 241.135,208.375 LED22.2@241.135,208.057
LED22_4: H4.2 LED22.4 LED114.2 | length 63.5
  Top Layer w1: LED22.4@236.135,205.057 237.635,206.557 243.08,206.557 244.604,208.081 H4.2@252.605,208.081 254.764,208.081 256.034,209.351 256.034,243.514 254.51,245.038 251.97,245.038 251.107,244.126 LED114.2@251.107,242.457
LED24_2: LED24.2 LED34.4 | length 12.2
  Top Layer w1: LED24.2@224.879,190.15 227.864,190.15 230.737,187.277 LED34.4@235.881,187.277
LED24_4: LED24.4 LED33.2 | length 11.8
  Top Layer w1: LED33.2@209.258,190.024 211.61,190.024 214.531,187.149 LED24.4@219.879,187.15
LED25_2: LED25.2 LED26.4 | length 12.3
  Top Layer w1: LED25.2@80.099,190.278 82.197,190.278 85.372,187.149 LED26.4@91.101,187.15
LED26_2: LED26.2 LED27.4 | length 12.6
  Top Layer w1: LED26.2@96.101,190.15 98.832,190.15 101.578,187.404 LED27.4@107.611,187.404
LED27_2: LED27.2 LED28.4 | length 11.5
  Top Layer w1: LED27.2@112.611,190.405 114.836,190.405 117.884,187.403 LED28.4@122.851,187.404
LED28_2: LED28.2 LED29.4 | length 13
  Top Layer w1: LED28.2@127.851,190.405 130.584,190.405 133.632,187.403 LED29.4@139.615,187.404
LED29_2: LED29.2 LED32.4 | length 12.3
  Top Layer w1: LED29.2@144.615,190.405 147.348,190.405 150.523,187.276 LED32.4@155.617,187.277
LED30_2: LED30.2 LED33.4 | length 13.5
  Top Layer w1: LED30.2@192.113,190.278 195.481,190.278 198.783,187.022 LED33.4@204.258,187.023
LED30_4: LED30.4 LED31.2 | length 11.9
  Top Layer w1: LED31.2@176.492,190.277 178.715,190.277 181.715,187.277 LED30.4@187.113,187.277
LED31_4: LED31.4 LED32.2 | length 12.1
  Top Layer w1: LED32.2@160.617,190.278 162.969,190.278 166.017,187.276 LED31.4@171.492,187.277
LED34_2: H6.2 H8.2 LED34.2 LED44.4 | length 50.2
  Top Layer w1: LED44.4@236.008,170.132 237.381,171.505 244.35,171.505 246.128,173.283 H8.2@252.478,173.283 254.002,173.283 255.145,174.426 255.145,188.904 253.748,190.301 H6.2@252.351,190.301 LED34.2@240.881,190.278
LED35_4: LED35.4 LED45.2 | length 23.5
  Top Layer w1: LED35.4@75.226,169.497 76.853,171.124 83.568,171.124 86.489,174.045 94.426,174.045 LED45.2@96.101,172.37
LED36_2: LED36.2 LED45.4 | length 25
  Top Layer w1: LED45.4@91.101,169.37 92.728,170.997 100.713,170.997 104.142,174.426 111.635,174.426 112.484,173.577 LED36.2@112.484,172.37
LED36_4: LED36.4 LED39.2 | length 23.6
  Top Layer w1: LED36.4@107.484,169.37 108.857,170.743 115.445,170.743 119.382,174.68 125.795,174.68 LED39.2@127.978,172.497
LED37_2: LED37.2 LED38.4 | length 24.3
  Top Layer w1: LED38.4@139.615,169.624 140.988,170.997 148.465,170.997 152.021,174.553 159.387,174.553 160.617,173.323 LED37.2@160.617,172.624
LED37_4: LED37.4 LED40.2 | length 23.7
  Top Layer w1: LED37.4@155.617,169.624 157.117,171.124 164.848,171.124 168.404,174.68 174.309,174.68 LED40.2@176.365,172.624
LED38_2: LED38.2 LED39.4 | length 24.6
  Top Layer w1: LED39.4@122.978,169.497 124.478,170.997 131.574,170.997 135.003,174.426 143.131,174.426 144.615,172.942 LED38.2@144.615,172.624
LED40_4: LED40.4 LED41.2 | length 24.1
  Top Layer w1: LED40.4@171.365,169.624 172.738,170.997 181.104,170.997 184.914,174.807 190.438,174.807 LED41.2@192.494,172.751
LED41_4: LED41.4 LED42.2 | length 25.2
  Top Layer w1: LED41.4@187.494,169.751 188.994,171.251 197.741,171.251 201.424,174.934 208.282,174.934 209.131,174.085 LED42.2@209.131,173.005
LED42_4: LED42.4 LED43.2 | length 24.6
  Top Layer w1: LED42.4@204.131,170.005 205.631,171.505 212.6,171.505 216.41,175.315 223.776,175.315 224.752,174.339 LED43.2@224.752,173.005
LED43_4: LED43.4 LED44.2 | length 24.3
  Top Layer w1: LED43.4@219.752,170.005 221.125,171.378 229.364,171.378 233.174,175.188 238.952,175.188 LED44.2@241.008,173.132
LED46_2: LED46.2 LED56.4 | length 12.5
  Top Layer w1: LED46.2@224.752,155.48 228.247,155.48 231.295,152.478 LED56.4@236.008,152.479
LED46_4: LED46.4 LED55.2 | length 11.9
  Top Layer w1: LED55.2@209.131,155.606 211.989,155.606 215.116,152.479 LED46.4@219.752,152.479
LED47_2: LED47.2 LED48.4 | length 11.7
  Top Layer w1: LED47.2@80.607,155.48 83.721,155.48 86.769,152.478 LED48.4@91.101,152.479
LED48_2: LED48.2 LED49.4 | length 12.4
  Top Layer w1: LED48.2@96.101,155.48 99.215,155.48 102.263,152.478 LED49.4@107.23,152.479
LED49_2: LED49.2 LED50.4 | length 12.1
  Top Layer w1: LED49.2@112.23,155.48 114.836,155.48 117.884,152.478 LED50.4@123.105,152.479
LED50_2: LED50.2 LED51.4 | length 12.7
  Top Layer w1: LED50.2@128.105,155.48 131.854,155.48 134.775,152.605 LED51.4@139.615,152.606
LED51_2: LED51.2 LED54.4 | length 12.2
  Top Layer w1: LED51.2@144.615,155.607 147.856,155.607 150.904,152.605 LED54.4@155.617,152.606
LED52_2: LED52.2 LED55.4 | length 12.7
  Top Layer w1: LED52.2@192.748,155.734 196.243,155.734 199.418,152.605 LED55.4@204.131,152.606
LED52_4: LED52.4 LED53.2 | length 12.6
  Top Layer w1: LED53.2@176.238,155.48 179.733,155.48 182.527,152.732 LED52.4@187.748,152.733
LED53_4: LED53.4 LED54.2 | length 11.9
  Top Layer w1: LED54.2@160.617,155.607 163.604,155.607 166.779,152.478 LED53.4@171.238,152.479
LED56_2: H10.2 H12.2 LED56.2 LED66.4 | length 51.7
  Top Layer w1: LED66.4@236.135,133.429 237.762,135.056 245.112,135.056 247.017,136.961 H12.2@252.478,136.961 254.002,136.961 255.145,138.104 255.145,154.106 253.875,155.376 H10.2@252.478,155.376 241.111,155.376 LED56.2@241.008,155.479
LED57_4: LED57.4 LED67.2 | length 23.6
  Top Layer w1: LED57.4@75.48,133.81 76.98,135.31 84.711,135.31 88.267,138.866 93.982,138.866 95.974,136.874 LED67.2@95.974,136.683
LED58_2: LED58.2 LED67.4 | length 24.2
  Top Layer w1: LED67.4@90.974,133.683 92.611,133.682 94.109,135.183 102.237,135.183 105.793,138.739 110.175,138.739 LED58.2@112.23,136.684
LED58_4: LED58.4 LED61.2 | length 23.9
  Top Layer w1: LED58.4@107.23,133.683 108.73,135.183 117.35,135.183 120.652,138.485 126.621,138.485 127.978,137.128 LED61.2@127.978,136.556
LED59_2: LED59.2 LED60.4 | length 24.7
  Top Layer w1: LED60.4@139.615,133.81 141.115,135.31 148.465,135.31 151.894,138.739 159.768,138.739 160.744,137.763 LED59.2@160.744,136.683
LED59_4: LED59.4 LED62.2 | length 23.7
  Top Layer w1: LED59.4@155.744,133.683 157.498,135.437 165.229,135.437 168.531,138.739 175.135,138.739 176.238,137.637 LED62.2@176.238,136.938
LED60_2: LED60.2 LED61.4 | length 25
  Top Layer w1: LED61.4@122.978,133.556 124.351,134.929 132.336,134.929 136.146,138.739 143.385,138.739 144.615,137.509 LED60.2@144.615,136.81
LED62_4: LED62.4 LED63.2 | length 24.1
  Top Layer w1: LED62.4@171.238,133.937 172.611,135.31 181.739,135.31 185.041,138.612 190.692,138.612 LED63.2@192.621,136.683
LED63_4: LED63.4 LED64.2 | length 24.9
  Top Layer w1: LED63.4@187.663,133.453 189.288,135.079 197.147,135.079 200.449,138.381 208.386,138.381 209.258,137.51 LED64.2@209.258,136.557
LED64_4: LED64.4 LED65.2 | length 24.4
  Top Layer w1: LED64.4@204.3,133.326 206.029,135.056 212.87,135.056 216.578,138.762 223.309,138.762 224.792,137.278 LED65.2@224.792,136.199
LED65_4: LED65.4 LED66.2 | length 25.3
  Top Layer w1: LED65.4@219.752,133.429 221.252,134.929 225.681,134.929 229.618,138.866 239.778,138.866 241.135,137.509 LED66.2@241.135,136.429
LED68_2: LED68.2 LED78.4 | length 12.8
  Top Layer w1: LED68.2@224.625,120.427 227.61,120.427 230.61,117.427 LED78.4@236.135,117.427
LED68_4: LED68.4 LED77.2 | length 11.7
  Top Layer w1: LED77.2@209.131,120.428 210.975,120.428 214.023,117.426 LED68.4@219.625,117.427
LED69_2: LED69.2 LED70.4 | length 11.3
  Top Layer w1: LED69.2@80.607,120.173 82.452,120.173 85.325,117.3 LED70.4@90.72,117.3
LED70_2: LED70.2 LED71.4 | length 12.7
  Top Layer w1: LED70.2@95.72,120.3 98.754,120.3 101.882,117.172 LED71.4@107.103,117.173
LED71_2: LED71.2 LED72.4 | length 12.2
  Top Layer w1: LED71.2@112.103,120.174 114.836,120.174 117.757,117.299 LED72.4@123.105,117.3
LED72_2: LED72.2 LED73.4 | length 12.5
  Top Layer w1: LED72.2@128.105,120.3 131.471,120.3 134.471,117.3 LED73.4@139.361,117.3
LED73_2: LED73.2 LED76.4 | length 12.7
  Top Layer w1: LED73.2@144.361,120.3 147.6,120.3 150.727,117.173 LED76.4@155.744,117.173
LED74_2: LED74.2 LED77.4 | length 12.8
  Top Layer w1: LED74.2@192.494,120.301 196.243,120.301 199.164,117.426 LED77.4@204.131,117.427
LED74_4: LED74.4 LED75.2 | length 12.4
  Top Layer w1: LED75.2@176.238,120.174 179.098,120.174 182.019,117.299 LED74.4@187.494,117.3
LED75_4: LED75.4 LED76.2 | length 11.7
  Top Layer w1: LED76.2@160.744,120.174 163.477,120.174 166.525,117.172 LED75.4@171.238,117.173
LED78_2: H14.2 H16.2 LED78.2 LED88.4 | length 51.2
  Top Layer w1: LED88.4@236.262,99.393 237.889,101.02 245.239,101.02 246.763,102.544 H16.2@252.605,102.544 254.383,102.544 255.399,103.56 255.399,119.054 254.002,120.451 H14.2@252.478,120.451 LED78.2@241.135,120.428
LED79_4: LED79.4 LED89.2 | length 23.1
  Top Layer w1: LED79.4@75.607,100.028 77.107,101.528 84.457,101.528 88.267,105.338 93.283,105.338 LED89.2@95.593,103.028
LED80_2: LED80.2 LED89.4 | length 24.3
  Top Layer w1: LED89.4@90.593,100.028 91.966,101.401 100.459,101.401 103.888,104.83 109.73,104.83 111.659,102.901 LED80.2@112.103,102.901
LED80_4: LED80.4 LED83.2 | length 24.6
  Top Layer w1: LED80.4@107.103,99.901 108.603,101.401 116.842,101.401 120.525,105.084 126.875,105.084 128.105,103.854 LED83.2@128.105,102.901
LED81_2: LED81.2 LED82.4 | length 24.4
  Top Layer w1: LED82.4@139.361,99.901 140.734,101.274 147.703,101.274 151.259,104.83 158.942,104.83 LED81.2@160.871,102.901
LED81_4: LED81.4 LED84.2 | length 23.6
  Top Layer w1: LED81.4@155.871,99.901 157.244,101.274 164.594,101.274 168.404,105.084 174.627,105.084 176.238,103.473 LED84.2@176.238,103.028
LED82_2: LED82.2 LED83.4 | length 25
  Top Layer w1: LED83.4@123.105,99.901 124.478,101.274 132.717,101.274 136.781,105.338 142.75,105.338 144.361,103.727 LED82.2@144.361,102.901
LED84_4: LED84.4 LED85.2 | length 24.3
  Top Layer w1: LED84.4@171.238,100.028 172.738,101.528 181.485,101.528 185.041,105.084 190.184,105.084 LED85.2@192.494,102.774
LED85_4: LED85.4 LED86.2 | length 24.6
  Top Layer w1: LED85.4@187.494,99.774 189.121,101.401 196.09,101.401 199.138,104.449 207.774,104.449 209.131,103.092 LED86.2@209.131,102.647
LED86_4: LED86.4 LED87.2 | length 23.9
  Top Layer w1: LED86.4@204.131,99.647 205.631,101.147 213.743,101.147 217.426,104.83 223.141,104.83 224.498,103.473 LED87.2@224.498,102.647
LED87_4: LED87.4 LED88.2 | length 24.6
  Top Layer w1: LED87.4@219.498,99.647 221.125,101.274 229.237,101.274 232.412,104.449 239.206,104.449 LED88.2@241.262,102.393
LED90_2: LED90.2 LED100.4 | length 12.9
  Top Layer w1: LED90.2@224.625,84.741 227.866,84.741 230.867,81.74 LED100.4@236.262,81.74
LED90_4: LED90.4 LED99.2 | length 11.8
  Top Layer w1: LED99.2@209.131,84.868 211.61,84.868 214.785,81.739 LED90.4@219.625,81.74
LED91_2: LED91.2 LED92.4 | length 11
  Top Layer w1: LED91.2@80.607,84.741 82.832,84.741 85.88,81.739 LED92.4@90.339,81.74
LED92_2: LED92.2 LED93.4 | length 12.8
  Top Layer w1: LED92.2@95.339,84.741 98.453,84.741 101.374,81.866 LED93.4@106.976,81.867
LED93_2: LED93.2 LED94.4 | length 12.4
  Top Layer w1: LED93.2@111.976,84.867 114.707,84.867 117.731,81.843 117.882,81.994 LED94.4@123.105,81.994
LED94_2: LED94.2 LED95.4 | length 12.5
  Top Layer w1: LED94.2@128.105,84.995 130.965,84.995 134.14,81.866 LED95.4@139.361,81.867
LED95_2: LED95.2 LED98.4 | length 12.8
  Top Layer w1: LED95.2@144.361,84.867 147.092,84.867 150.116,81.843 150.267,81.994 LED98.4@155.871,81.994
LED96_2: LED96.2 LED99.4 | length 12.8
  Top Layer w1: LED96.2@192.621,85.122 195.608,85.122 198.91,81.866 LED99.4@204.131,81.867
LED96_4: LED96.4 LED97.2 | length 12.6
  Top Layer w1: LED97.2@176.111,84.868 179.733,84.868 182.527,82.12 LED96.4@187.621,82.121
LED97_4: LED97.4 LED98.2 | length 11.5
  Top Layer w1: LED98.2@160.871,84.994 163.602,84.994 166.729,81.867 LED97.4@171.111,81.867
LED100_2: H18.2 LED100.2 LED113.4 | length 56.3
  Top Layer w1: LED100.2@241.262,84.74 252.375,84.74 H18.2@252.605,84.51 252.859,84.256 254.383,84.256 257.812,80.827 257.812,51.871 256.415,50.474 252.351,50.474 250.851,48.974 LED113.4@249.851,48.974
LED101_4: LED101.4 LED111.2 | length 23.1
  Top Layer w1: LED101.4@75.48,64.595 76.98,66.095 82.933,66.095 86.87,70.032 93.283,70.032 LED111.2@95.466,67.849
LED102_2: LED102.2 LED111.4 | length 24.3
  Top Layer w1: LED111.4@90.466,64.849 91.966,66.349 98.3,66.349 101.475,69.524 110.301,69.524 LED102.2@112.103,67.722
LED102_4: LED102.4 LED105.2 | length 24
  Top Layer w1: LED102.4@107.103,64.722 107.849,64.722 109.222,66.095 117.096,66.095 120.652,69.651 126.176,69.651 LED105.2@128.232,67.595
LED103_2: LED103.2 LED104.4 | length 24.3
  Top Layer w1: LED104.4@139.615,64.214 141.115,65.714 148.973,65.714 152.529,69.27 159.069,69.27 LED103.2@160.998,67.341
LED103_4: LED103.4 LED106.2 | length 23.1
  Top Layer w1: LED103.4@155.998,64.341 157.625,65.968 164.594,65.968 167.642,69.016 174.754,69.016 176.111,67.659 LED106.2@176.111,67.214
LED104_2: LED104.2 LED105.4 | length 24.4
  Top Layer w1: LED105.4@123.232,64.595 124.732,66.095 131.828,66.095 135.003,69.27 143.004,69.27 144.615,67.659 LED104.2@144.615,67.214
LED106_4: LED106.4 LED107.2 | length 24.5
  Top Layer w1: LED106.4@171.111,64.214 172.738,65.841 181.993,65.841 185.422,69.27 190.756,69.27 192.494,67.532 LED107.2@192.494,67.214
LED107_4: LED107.4 LED108.2 | length 24.9
  Top Layer w1: LED107.4@187.494,64.214 188.994,65.714 198.63,65.714 202.313,69.397 207.52,69.397 209.131,67.786 LED108.2@209.131,67.341
LED108_4: LED108.4 LED109.2 | length 23.3
  Top Layer w1: LED108.4@204.131,64.341 205.631,65.841 213.997,65.841 217.172,69.016 223.141,69.016 224.498,67.659 LED109.2@224.498,67.214
LED109_4: LED109.4 LED110.2 | length 24.7
  Top Layer w1: LED109.4@219.498,64.214 220.998,65.714 228.348,65.714 232.031,69.397 239.397,69.397 240.881,67.913 LED110.2@240.881,67.341
LED110_4: H20.2 LED110.4 LED113.2 | length 36.8
  Top Layer w1: LED110.4@235.881,64.341 237.508,65.968 243.334,65.968 244.858,67.492 H20.2@252.732,67.492 255.018,67.492 255.907,66.603 255.907,53.03 LED113.2@254.851,51.974
LED112_2: LED112.2
MATRIX_DIN: H2.2 LED8.4 LED115.2 | length 33.7
  Top Layer w0.508: v2(59.565,222.432) 59.565,224.083 59.565,236.656 61.367,238.458 LED115.2@62.907,238.458 ; H2.2@64.772,222.305 64.923,222.456 LED8.4@74.845,222.456
  Bottom Layer w0.508: v2(59.565,222.432) 64.645,222.432 H2.2@64.772,222.305
QBOOT_1: QBOOT.1
QBOOT_2: QBOOT.2 R11.2 | length 5.2
  Top Layer w0.254: QBOOT.2@184.084,243.456 184.729,243.456 185.803,244.53 R11.2@185.803,247.578
QBOOT_3: QBOOT.3
QSPI_CLK: QU1.52 QU2.6 | length 14.8
  Top Layer w0.229: QU1.52@166.24,242.61 169.055,242.61 169.062,242.483 168.821,242.244 168.821,242.125 168.882,242.064 169.001,242.064 169.24,242.302 169.362,242.302 169.42,242.244 169.42,242.125 169.182,241.883 169.182,241.764 169.24,241.706 169.362,241.706 169.601,241.944 169.72,241.944 169.781,241.883 169.781,241.764 169.54,241.525 169.54,241.406 169.601,241.345 169.72,241.345 169.959,241.586 170.078,241.586 173.103,238.561 175.897,238.561 QU2.6@175.897,239.612
QSPI_SD0: QU1.53 QU2.5 | length 14.7
  Top Layer w0.229: QU1.53@166.239,243.009 170.307,243.009 170.37,242.945 170.49,242.945 170.728,243.186 170.848,243.186 170.909,243.125 170.909,243.006 170.67,242.767 170.67,242.645 170.728,242.587 170.848,242.587 171.089,242.826 171.208,242.826 171.267,242.767 171.267,242.645 171.028,242.407 171.028,242.287 171.089,242.226 171.208,242.226 171.447,242.468 171.567,242.468 171.628,242.407 171.628,242.287 171.386,242.048 171.386,241.929 171.447,241.868 171.567,241.868 171.805,242.107 171.927,242.107 171.986,242.048 171.986,241.929 171.747,241.688 171.747,241.568 171.805,241.51 171.927,241.51 172.166,241.749 172.285,241.749 172.346,241.688 172.346,241.568 172.105,241.33 172.105,241.21 172.166,241.149 172.285,241.149 172.524,241.391 172.644,241.391 172.705,241.33 172.705,241.21 172.466,240.971 172.466,240.85 173.703,239.613 QU2.5@174.627,239.612
QSPI_SD1: QU1.55 QU2.2 | length 15.5
  Top Layer w0.229: QU1.55@166.239,243.809 168.953,243.809 169.415,244.271 169.415,244.39 169.176,244.632 169.176,244.751 169.235,244.809 169.357,244.809 169.596,244.571 169.715,244.571 170.152,245.008 170.152,245.127 169.913,245.368 169.913,245.488 169.972,245.546 170.093,245.546 170.332,245.307 170.452,245.307 172.468,247.324 176.786,247.324 177.167,246.943 QU2.2@177.167,245.638
QSPI_SD2: QU1.54 QU2.3 | length 15.5
  Top Layer w0.229: QU1.54@166.24,243.41 170.332,243.41 170.5,243.577 170.5,243.697 170.261,243.936 170.261,244.055 170.319,244.116 170.439,244.116 170.68,243.877 170.8,243.877 170.858,243.936 170.858,244.055 170.619,244.296 170.619,244.416 170.68,244.474 170.8,244.474 171.038,244.235 171.158,244.235 171.219,244.296 171.219,244.416 170.977,244.654 170.977,244.774 171.038,244.835 171.158,244.835 171.396,244.593 171.516,244.593 171.577,244.654 171.577,244.774 171.338,245.015 171.338,245.135 171.396,245.193 171.516,245.193 171.757,244.954 171.877,244.954 173.865,246.943 175.516,246.943 175.897,246.562 QU2.3@175.897,245.638
QSPI_SD3: QU1.51 QU2.7 | length 14.9
  Top Layer w0.229: QU1.51@166.239,242.209 167.805,242.208 171.747,238.266 171.866,238.266 172.105,238.505 172.224,238.505 172.285,238.447 172.285,238.327 172.047,238.086 172.047,237.967 172.087,237.926 176.659,237.926 177.167,238.434 QU2.7@177.167,239.612
QSPI_SS: QU1.56 QU2.1 R11.1 R12.2 | length 35.5
  Top Layer w0.229: QU1.56@166.24,244.21 167.83,244.21 171.579,247.959 177.421,247.959 178.437,246.943 QU2.1@178.437,245.638 180.378,247.578 R11.1@183.771,247.578 ; QU2.1@178.437,245.638 182.791,245.638 183.263,245.165 183.263,243.768 182.882,243.387 180.723,243.387 180.342,243.006 180.342,239.45 R12.2@180.85,238.942
QU1_46: QU1.46 R9.1 | length 8.6
  Top Layer w0.229: QU1.46@166.239,240.209 167.518,240.209 171.579,236.148 R9.1@173.153,236.148
QU1_47: QU1.47 R7.1 | length 17.3
  Top Layer w0.229: QU1.47@166.239,240.609 168.526,240.598 169.1,240.024 169.1,239.905 168.862,239.663 168.862,239.544 168.922,239.486 169.042,239.486 169.281,239.724 169.4,239.724 169.461,239.663 169.461,239.544 169.22,239.305 169.22,239.186 169.281,239.125 169.4,239.125 169.639,239.366 169.758,239.366 169.819,239.305 169.819,239.186 169.58,238.945 169.58,238.825 169.639,238.767 169.758,238.767 169.999,239.005 170.119,239.005 170.177,238.945 170.177,238.825 169.938,238.586 169.938,238.467 169.999,238.406 170.119,238.406 170.358,238.647 170.477,238.647 170.538,238.586 170.538,238.467 170.299,238.228 170.299,238.109 170.358,238.048 170.477,238.048 170.718,238.287 170.838,238.287 171.706,237.418 176.329,237.418 R7.1@177.599,236.148
QU2_9: QU2.9
R10_2: JP8.1 R10.2 U6.3 | length 5.2
  Top Layer w0.254: U6.3@109.089,238.627 110.238,237.478 R10.2@110.238,236.021 JP8.1@112.372,236.021
R13_2: LED116.2 R13.2 | length 2.4
  Top Layer w0.508: LED116.2@142.453,234.751 R13.2@144.832,234.751
RPRST_1: RPRST.1
RPRST_3: RPRST.3
RUN: P1.2 QU1.26 R5.1 RPRST.2 | length 20.4
  Top Layer w0.229: R5.1@144.782,238.307 145.095,238.62 RPRST.2@145.095,241.668 146.152,241.668 P1.2@147.83,239.99 ; P1.2@147.83,239.991 150.149,237.672 v1(151.005,237.672) ; v1(156.72,237.672) 157.609,238.561 157.609,239.196 158.223,239.809 QU1.26@159.139,239.809
  Bottom Layer w0.229: v1(151.005,237.672) v1(156.72,237.672)
S$28: 
S$38: 
S$40: 
SWCLK: P1.4 QU1.24 | length 15.6
  Top Layer w0.229: P1.4@147.83,243.99 149.227,242.592 149.227,239.958 150.243,238.942 v1(152.148,238.942) ; v1(155.577,238.942) 156.085,238.942 157.752,240.608 QU1.24@159.139,240.609
  Bottom Layer w0.229: v1(152.148,238.942) v1(155.577,238.942)
SWD: P1.3 QU1.25 | length 14.4
  Top Layer w0.229: P1.3@147.83,241.99 147.957,241.99 148.846,241.101 148.846,239.704 150.243,238.307 v1(151.64,238.307) ; v1(156.085,238.307) 157.988,240.209 QU1.25@159.138,240.209
  Bottom Layer w0.229: v1(151.64,238.307) v1(156.085,238.307)
U1_2: R1.1 U1.2 | length 3
  Top Layer w0.3: U1.2@132.367,248.086 134.799,248.086 R1.1@135.18,247.705
U1_5: C7.1 R2.1 U1.5 | length 15.6
  Top Layer w0.254: R2.1@125.748,244.911 125.748,246.07 125.986,246.308 v1(126.748,246.308)
  Top Layer w0.3: v1(127.637,248.213) 127.764,248.086 U1.5@129.512,248.086 ; v1(133.352,246.308) C7.1@135.13,244.53
  Bottom Layer w0.3: v1(127.637,248.213) 126.748,247.324 v1(126.748,246.308) v1(133.352,246.308)
U1_7: U1.7
U2_4: U2.4
U3_4: U3.4
U3_8: U3.8
U3_9: U3.9
U3_11: U3.11
U4_1: U4.1
U4_2: U4.2
U4_3: U4.3
U4_7: U4.7
U5_2: U5.2
U5_3: R8.1 U5.3 | length 23.9
  Top Layer w0.254: v2(224.03,237.926) 224.03,242.244 225.427,243.641 v2(232.666,243.641)
  Bottom Layer w0.254: v2(217.68,237.545) 218.061,237.926 v2(224.03,237.926) ; v2(232.666,243.641) 232.761,243.735 v2(232.761,247.509)
U5_5: U5.5
U5_6: U5.6
U5_7: U5.7
U5_10: R16.2 U5.10 | length 12.1
  Top Layer w0.508: R16.2@217.68,235.005 217.68,234.497 218.95,233.227 218.95,231.83 220.728,230.052 223.903,230.052 224.762,230.911 U5.10@224.761,232.408